# EAGLE board One-Transistor-FM-Super-Regen-Dip2 (EAGLE 7.5.0)
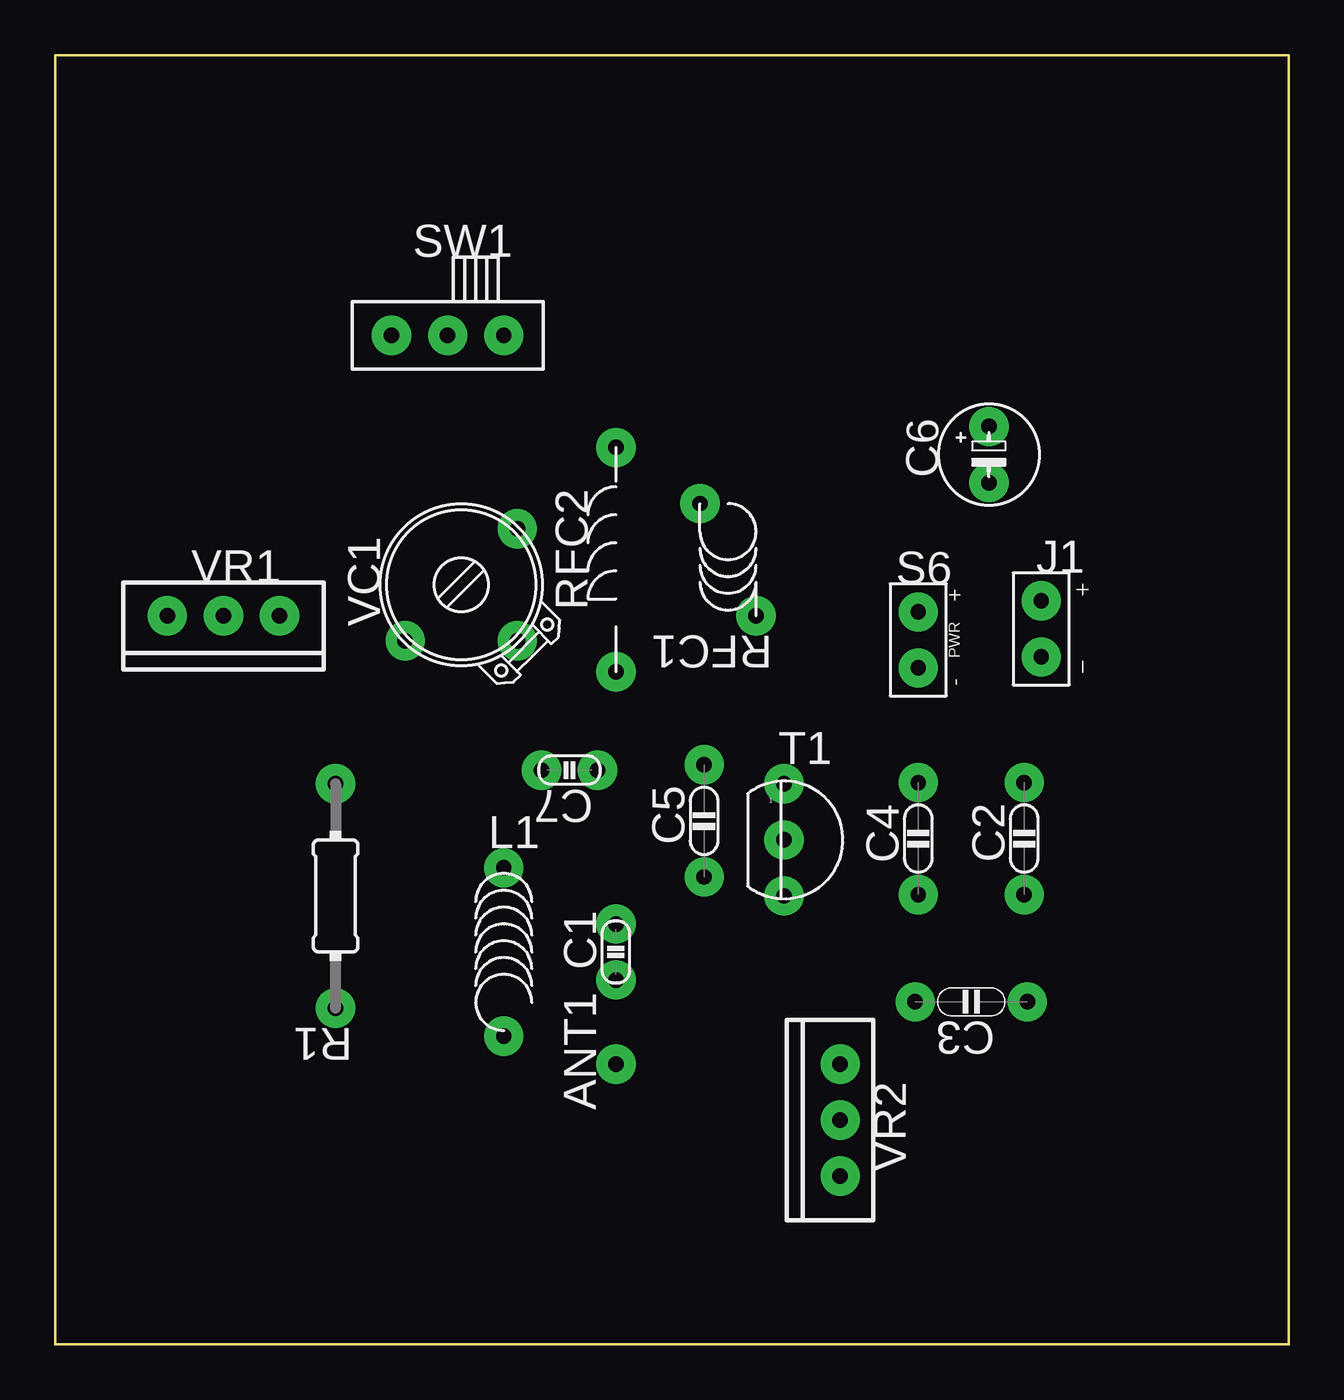
[diagram p0: board, top side]
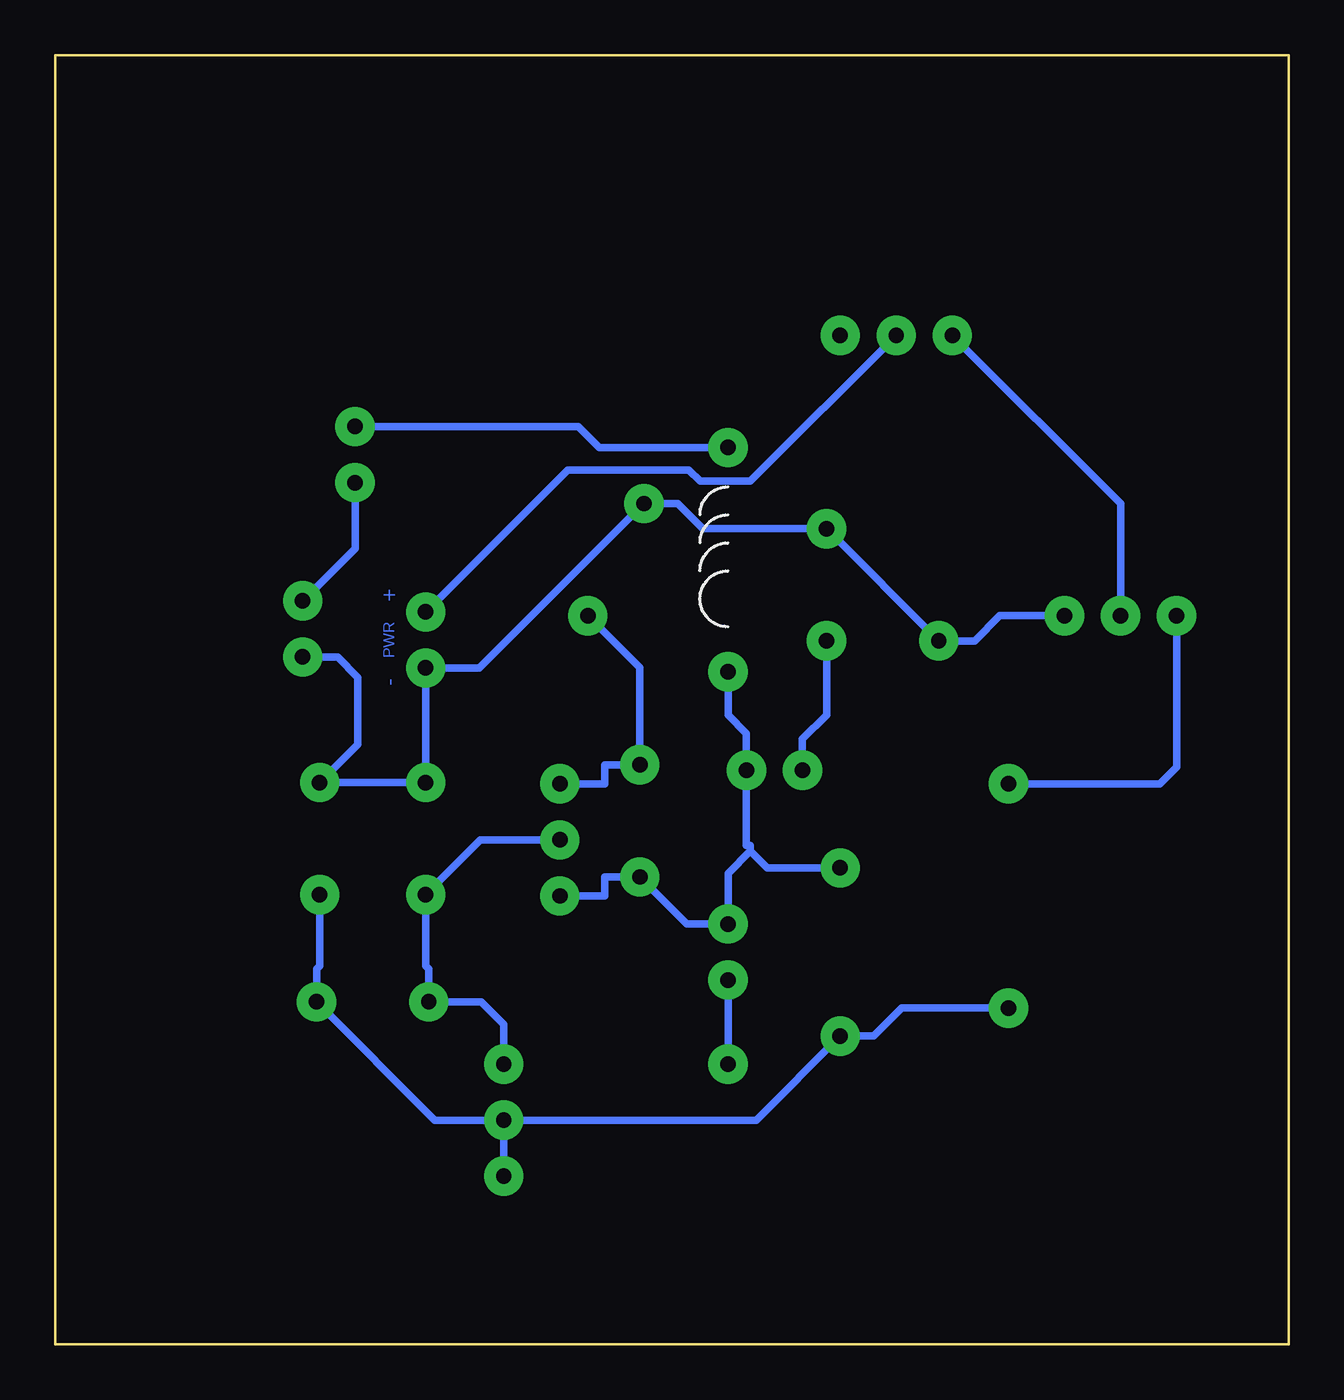
[diagram p1: board, bottom side, seen from below]

Size 55.88 x 58.42 mm. Coordinates in mm from the lower left corner, seen from the top.
Outline: 0,55.88 0,0 55.88,0 55.88,58.42 0,58.42 0,55.88
Copper layers (1*16): Top 0.035mm / dielectric 1.5mm / Bottom 0.035mm
Design rules "default *": minimum track width 10mil, minimum drill 0.61mm, track to track 8mil, track to pad 8mil, pad to pad 8mil, via to via 8mil, smd to smd 8mil, copper to edge 40mil, drill to drill 8mil, minimum pad ring 0mil, minimum via ring 8mil, stop-mask expansion 2mil, vias tented up to drill 15mil, thermal gap 10mil
Net classes: 0 default: width 0.33 mm, clearance 0.33 mm

## Footprints (pad centres in the part's own frame; a part is rotated, then mirrored left to right if it is on the bottom)
SPAD = drill 0.7 pad 1.778: 1 0,0
C025-015X024 = drill 0.7 pad 1.778: 1 -1.27,0; 2 1.27,0
C050-020X036/V = drill 0.7 pad 1.778: 1 0,-2.54; 2 0,2.54
C050-020X036 = drill 0.7 pad 1.778: 1 -2.54,0; 2 2.54,0
E2,5-4 = drill 0.7 pad 1.778: + 1.27,0; - -1.27,0
SPAD+- = drill 0.7 pad 1.778: 1 0,-1.27; 2 0,1.27
L-04/7-V = drill 0.7 pad 1.778: 1 0,3.81; 2 0,-3.81
0204/10-V = drill 0.7 pad 1.778: 1 0,5.08; 2 0,-5.08
L-04-2/5V = drill 0.7 pad 1.778: 1 1.27,-2.54; 2 -1.27,2.54
L-03/10 = drill 0.7 pad 1.778: 1 5.08,0; 2 -5.08,0
PWR-R = drill 0.7 pad 1.778: 1 0,-1.27; 2 0,1.27
SLSW-1P2T-H = drill 0.7 pad 1.778: O 2.54,0; P 0,0; S -2.54,0
TO92 = drill 0.7 pad 1.778: 1 0,2.54; 2 0,0; 3 0,-2.54
TRIM-2222-808 = drill 0.7 pad 1.778: 1 -2.54,2.54; 2 -2.54,-2.54; 3 2.54,-2.54
TRIM-POT = drill 0.7 pad 1.778: A -2.54,0; E 2.54,0; S 0,0

## Placement (x,y rotation side)
ANT1  ANT  [SPAD]  25.4,12.7 90 top
C1  5pF  [C025-015X024]  25.4,17.78 90 top
C2  0.001  [C050-020X036/V]  43.9,22.92 0 top
C3  0.001  [C050-020X036]  41.5,15.52 180 top
C4  100pF  [C050-020X036/V]  39.1,22.92 0 top
C5  10pF  [C050-020X036/V]  29.4,23.72 0 top
C6  10µF  [E2,5-4]  42.3,40.32 90 top
C7  47pF  [C025-015X024]  23.3,26.02 180 top
J1  SPAD+-+-  [SPAD+-]  44.67,32.42 0 top
L1  4t  [L-04/7-V]  20.32,17.78 0 top
R1  2.2kΩ  [0204/10-V]  12.7,20.32 180 top
RFC1  10µH  [L-04-2/5V]  30.48,35.56 180 top
RFC2  10µH  [L-03/10]  25.4,35.56 90 top
S6  VCC_GNDPWR-R  [PWR-R]  39.1,31.92 0 top
SW1  SW-SPST-SL-1P2T-H  [SLSW-1P2T-H]  17.78,45.72 0 top
T1  2N3904  [TO92]  33.02,22.86 0 top
VC1  20pF  [TRIM-2222-808]  18.39,34.42 90 top
VR1  10kΩ  [TRIM-POT]  7.62,33.02 0 top
VR2  100kΩ  [TRIM-POT]  35.56,10.16 270 top

## Library data of the parts
ANT1 C1-C7 J1 L1 R1 RFC1 RFC2 S6 SW1 T1 VC1 VR1 VR2 = common

## Nets
GND: C2.2 C4.2 J1.1 RFC1.1 S6.1 VC1.1 VC1.3 VR1.E
N$1: ANT1.1 C1.1
N$2: C1.2 C5.1 C7.1 L1.1 RFC2.2 T1.3
N$3: C2.1 C3.1 L1.2 R1.1 VR2.E VR2.S
N$4: C7.2 VC1.2
N$5: R1.2 VR1.A
N$6: C5.2 RFC1.2 T1.1
N$7: C3.2 C4.1 T1.2 VR2.A
N$8: SW1.S VR1.S
N$9: C6.+ RFC2.1
N$10: C6.- J1.2
VCC: S6.2 SW1.P

## Tracks (layer width: path | path; a pad name or v marks a point on that pad's centre or on a via)
GND
  Bottom 0.33: VR1.E 13.08,33.02 14.22,31.88 VC1.1 VC1.3 26.55,36.96 27.69,38.1 RFC1.1 36.66,30.65 S6.1 C4.2 C2.2 42.16,27.19 42.16,30.23 43.09,31.15 J1.1
N$1
  Bottom 0.33: ANT1.1 C1.1
N$2
  Bottom 0.33: RFC2.2 25.4,28.52 24.57,27.69 C7.1 24.57,22.61 24.38,22.61 24.38,22.35 | 24.38,22.35 25.4,21.34 C1.2 27.27,19.05 C5.1 30.99,21.18 30.99,20.32 T1.3 | 24.38,22.35 23.62,21.59 L1.1
N$3
  Bottom 0.33: R1.1 17.53,15.24 18.8,13.97 L1.2 24.13,10.16 VR2.S | VR2.S VR2.E | C2.1 43.9,17.16 44.04,17.02 C3.1 38.68,10.16 VR2.S
N$4
  Bottom 0.33: C7.2 22.03,27.43 20.93,28.53 VC1.2
N$5
  Bottom 0.33: R1.2 5.84,25.4 5.08,26.16 VR1.A
N$6
  Bottom 0.33: T1.1 30.99,25.4 30.99,26.26 C5.2 29.4,30.67 RFC1.2
N$7
  Bottom 0.33: VR2.A 35.56,14.5 36.58,15.52 C3.2 38.96,17.02 39.1,17.16 C4.1 36.62,22.86 T1.2
N$8
  Bottom 0.33: SW1.S 7.62,38.1 VR1.S
N$9
  Bottom 0.33: RFC2.1 31.24,40.64 32.19,41.59 C6.+
N$10
  Bottom 0.33: J1.2 42.3,36.06 C6.-
VCC
  Bottom 0.33: SW1.P 24.38,39.12 26.67,39.12 27.18,39.62 32.66,39.62 S6.2

## Text on the board
tPlace: SW1 | C6 | J1 | VR1 | S6 | RFC2 | VC1 | RFC1 | T1 | C7 | L1 | C5 | C4 | C2 | C1 | R1 | C3 | VR2 | ANT1